# Altium PCB Esquematico.PcbDoc
Units mil, origin at the board's own origin, x right, y up, seen from the top; angles counter-clockwise.
Board outline 2755.91 x 1968.5 mil, 2 copper layers (Top Layer, Bottom Layer); 18 components, 8 nets, 47 pads, 10 vias.
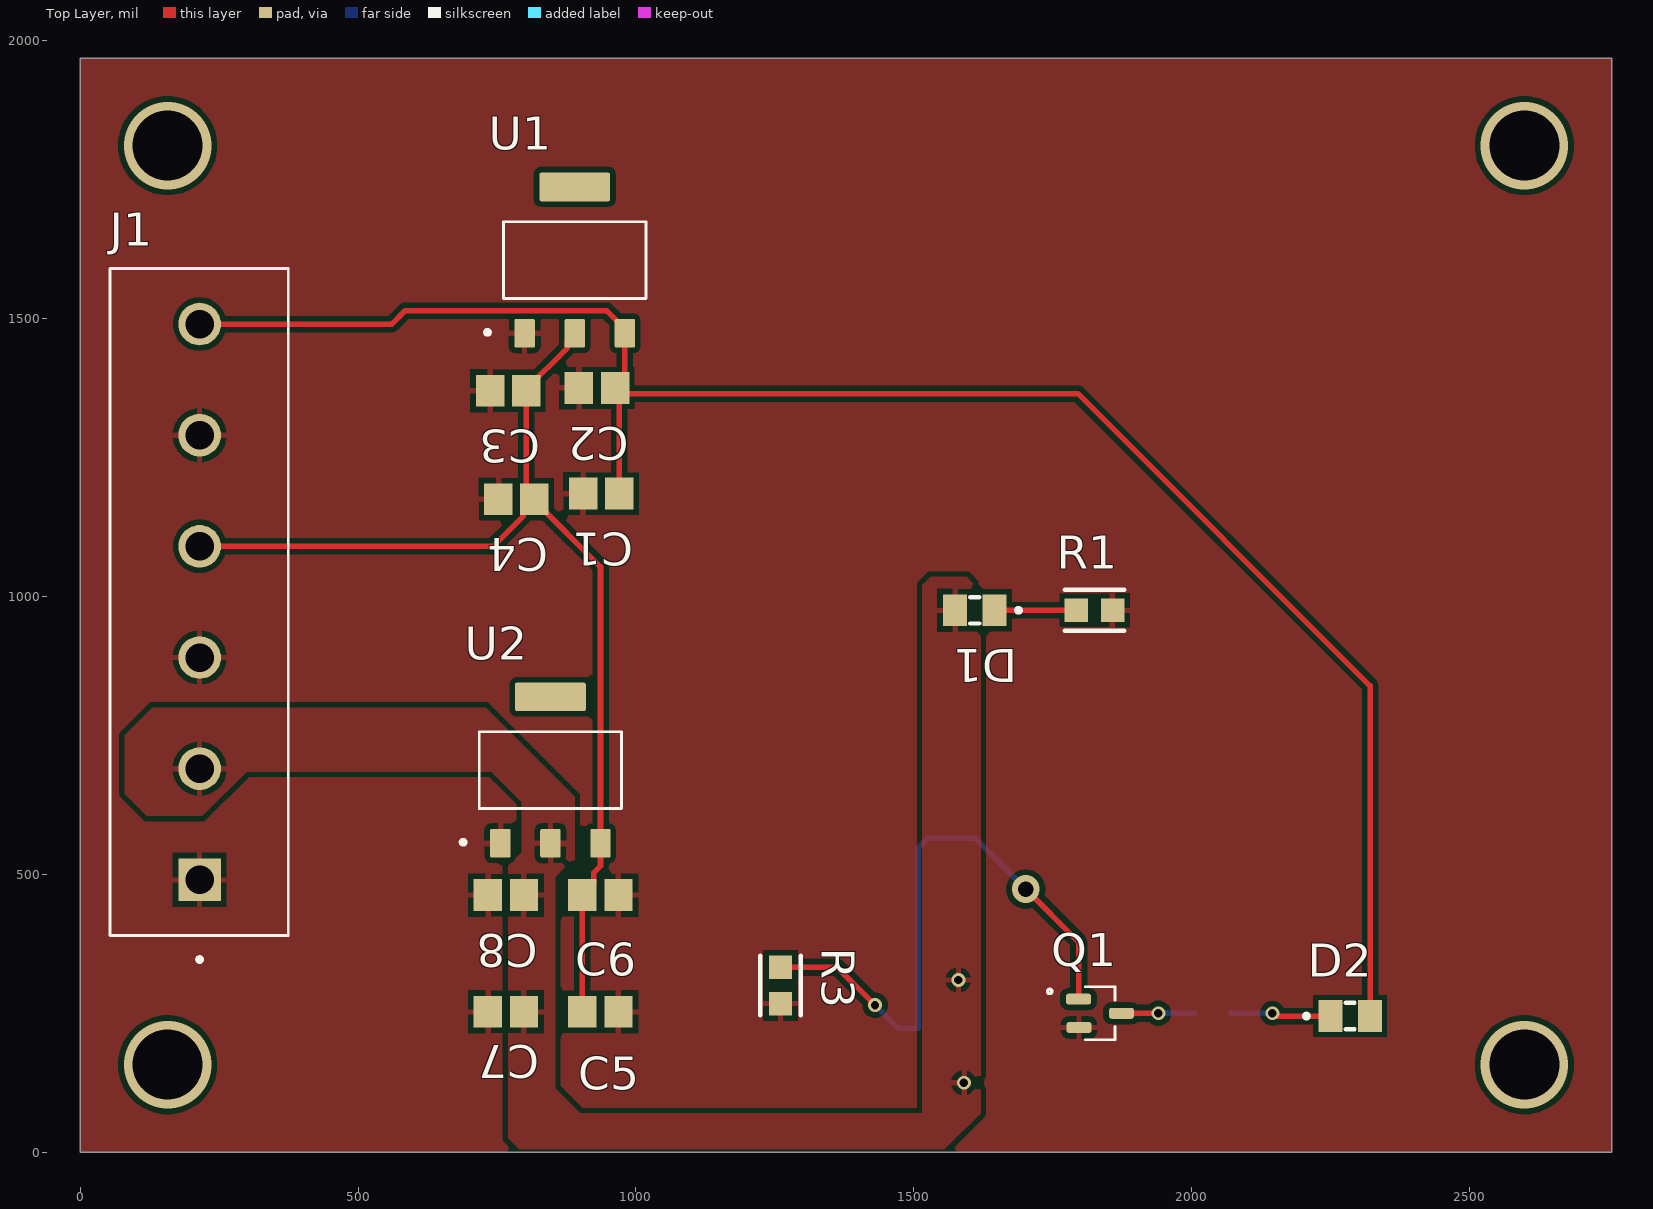
[diagram p0: Top Layer view]
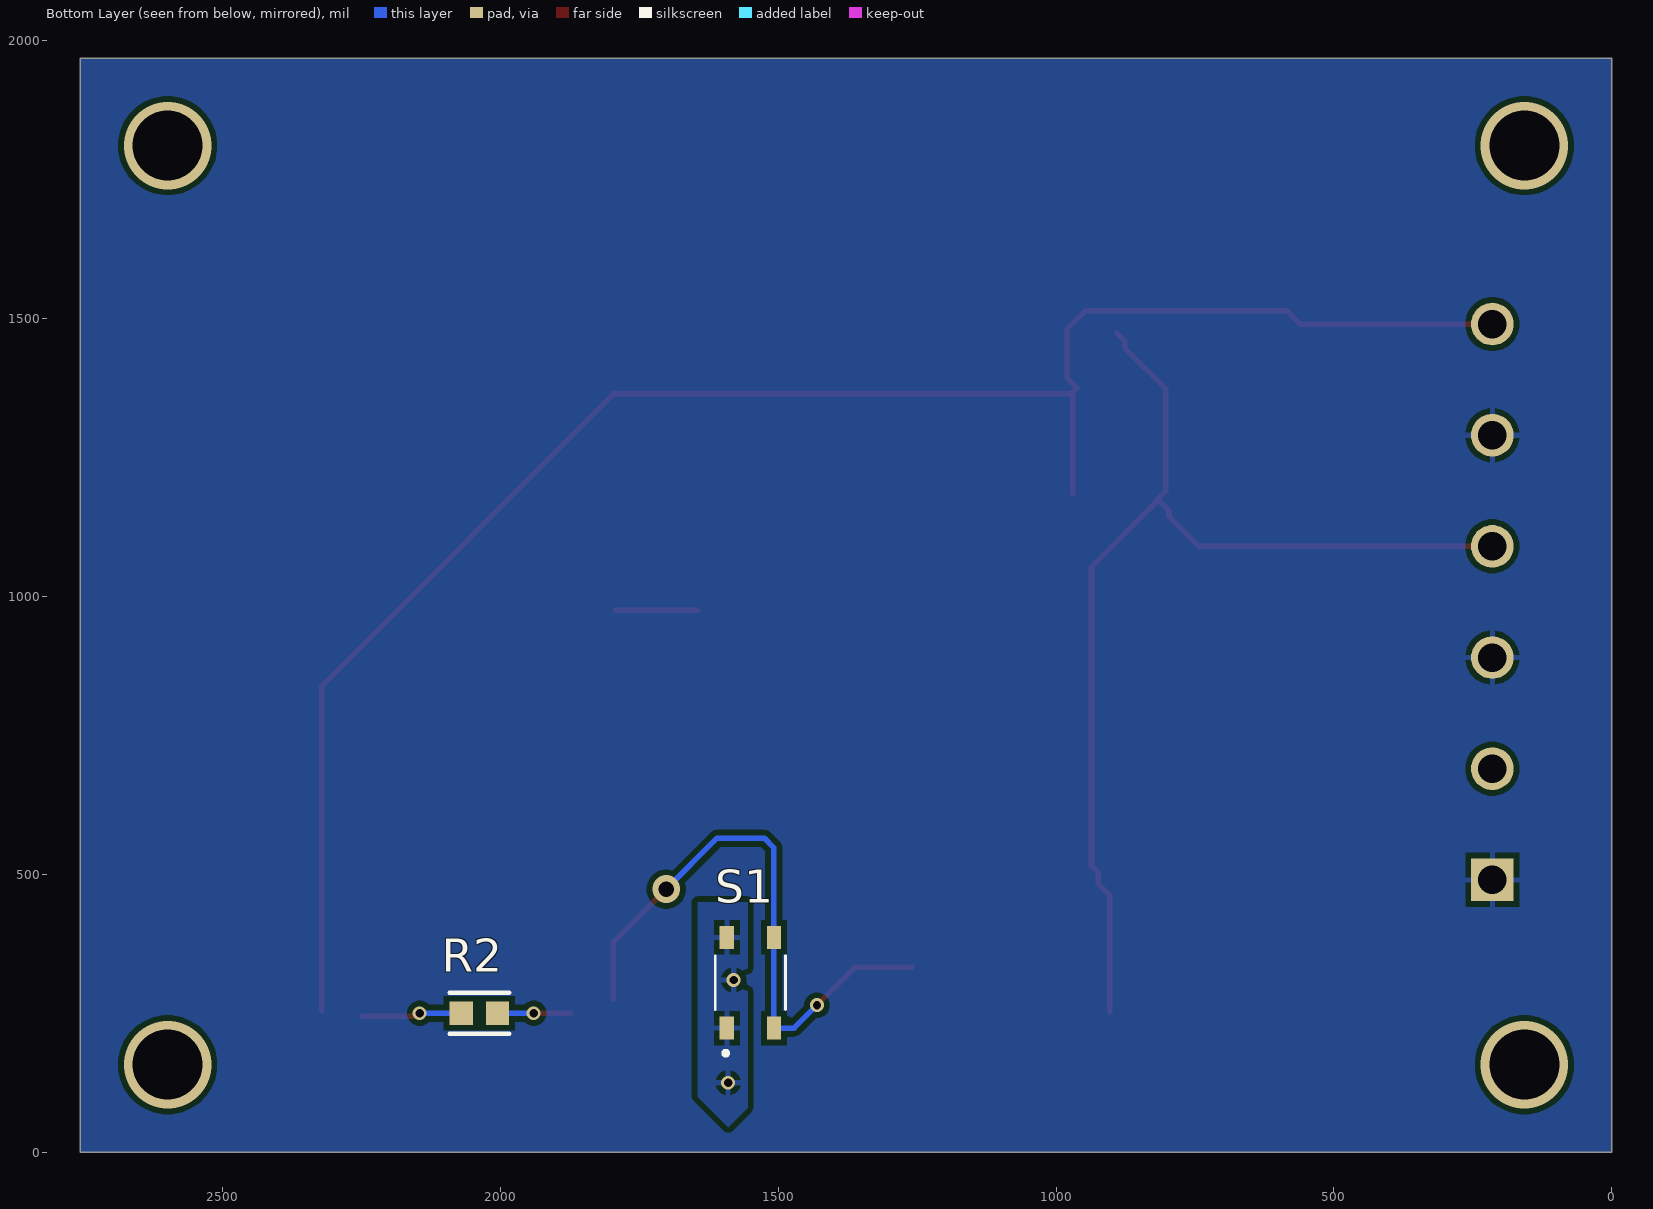
[diagram p1: Bottom Layer view, seen from below]

## Layer stack, top to bottom
Top Solder: solder mask 0.4, Solder Resist, Dk 3.5
Top Layer: signal copper 1.4
Dielectric 1: dielectric 12.6, FR-4, Dk 4.8
Bottom Layer: signal copper 1.4
Bottom Solder: solder mask 0.4, Solder Resist, Dk 3.5

## Board outline
0,0 2755.91,0 2755.91,1968.5 0,1968.5

## Design rules (kind name [scope] priority, off if disabled: settings)
Clearance [All] p1: gap=10 ignorepadtopadclearanceinfootprint=FALSE
PolygonConnect [All] p1: connectstyle=Relief reliefconductorwidth=10 reliefentries=4 polygonreliefangle="90 Angle" airgapwidth=10
RoutingVias [All] p1: holewidth=28 width=50 viastyle="Through Hole" minholewidth=28 minwidth=50 maxholewidth=28 maxwidth=50
SolderMaskExpansion [All] p1: expansion=0 istentingtop=FALSE
SupplyNets "Schematic Supply Nets" [InNet('GND')] p1: voltage=0.000
Width [All] p1: maxlimit=10 minlimit=10 preferedwidth=10
30 further rules are at their usual default settings.

## Components (designator, comment, footprint, x,y, rotation, side; value= is the part's Value field where it differs from the comment)
C1 "10uF" CAPC2013X145X48NL20T23 937.52,1185 r180 top
C2 "100nF" CAPC2013X145X48NL20T23 930,1375 r180 top
C3 "10uF" CAPC2013X145X48NL20T23 770,1370 r180 top
C4 "100nF" CAPC2013X145X48NL20T23 785,1175 r180 top
C5 "10uF" CAPC2013X145X48NL20T23 936.16,252.65 r0 top
C6 "100nF" CAPC2013X145X48NL20T23 936.16,462.65 r0 top
C7 "10uF" CAPC2013X145X48NL20T23 766.16,252.65 r180 top
C8 "100nF" CAPC2013X145X48NL20T23 766.16,462.65 r180 top
D1 "LED_Azul" LEDC2012X120N 1609.57,975 r180 top
D2 "LED_Azul" LEDC2012X120N 2285,245 r0 top
J1 "1729160" PHOENIX_1729160 374.45,390 r90 top
Q1 "NTS4001NT1G" SOT65P220X100-3N 1835,250 r0 top
R1 "330R" FP-MCT0603-IPC_A 1825,975 r0 top
R2 "10k" FP-MCT0603-IPC_A 2037.65,250 r180 bottom
R3 "1k" FP-MCT0603-IPC_A 1260,300 r270 top
S1 "SKRPABE010" SW_SKRPABE010 1550,305 r90 bottom
U1 "AMS1117-5.0" SOT229P700X180-4N 890,1605 r0 top
U2 "AMS1117-3.3v" SOT229P700X180-4N 846.16,687.65 r0 top

## Footprints (in the part's own frame and the unit in brackets; to place one, negate y for a bottom-side part, rotate by r counter-clockwise, add the part's x,y. Pads: shape width x height; smd on the part's side, far side on the other; paste and mask are expansions set on the pad)
CAPC2013X145X48NL20T23 [mm] "Chip Capacitor, 2-Leads, Body 2.00x1.25mm, IPC Medium Density"
  rect 1.3x1.45 smd: 1(-0.825,0) 2(0.825,0)
  body extent -1.1,-0.72 1.1,0.72, height 1.45
FP-MCT0603-IPC_A [mil]
  rect 41.88x41.82 smd paste+0 mask+0: 1(-32.65,0) 2(32.65,0)
  silkscreen extent -54,-37 54,37, body extent -73,-41 73,41, height 10
LEDC2012X120N [mm]
  rect 1.1x1.45 smd: A(0.9,0) C(-0.9,0)
  silkscreen extent -2.1,-0.6 0.2,0.6, body extent -1,-0.65 1,0.65, height 0.9
PHOENIX_1729160 [mm]
  rect 1.95x1.95 / inner round 1.95 / far side rect 1.95x1.95 hole 1.3: 1(2.54,4.05)
  round 1.95 hole 1.3: 2(7.62,4.05) 3(12.7,4.05) 4(17.78,4.05) 5(22.86,4.05) 6(27.94,4.05)
  silkscreen extent -1.2,0 30.48,8.15
SOT65P220X100-3N [mm]
  rrect50% 1.15x0.5 smd: 1(-0.98,0.65) 2(-0.96,-0.65) 3(0.98,0)
  silkscreen extent -2.4,-1.21 0.68,1.21
SOT229P700X180-4N [mm]
  rrect15% 0.93x1.31 smd: 1(-2.29,-3.345) 2(0,-3.345) 3(2.29,-3.345)
  rrect15% 3.24x1.31 smd: 4(0,3.345)
  silkscreen extent -4.09,-3.4 3.25,1.75, body extent -3.25,-3.5 3.25,3.5, height 1.8
SW_SKRPABE010 [mm]
  rect 1.05x0.65 smd: 1(-2.075,1.075) 2(2.075,1.075) 3(-2.075,-1.075) 4(2.075,-1.075)
  silkscreen extent -3.32,-1.6 1.23,1.6, body extent -2.3,-1.6 2.3,1.6, height 2.5

## Part data
C1 C2 C3 C4 C5 C6 C7 C8: library part CMP-2007-01790-1, Manufacturer=Vitramon, Part Number=VJ0805Y222JXAAC
D1 D2: library part SML-LXT0805IW-TR, "LED;Red;11mcd;0.061In.Dia.;SMD;100mA;2V Vf;635nm;140deg;SMD;White Diffused;5V Vr", Package="0805 Lumex", Check_prices=https://www.snapeda.com/parts/SML-LXT0805IW-TR/Lumex+Opto%252FComponents+Inc./view-part/?ref=eda, MF="Lumex Opto/Components", MP=SML-LXT0805IW-TR, SnapEDA_Link=https://www.snapeda.com/parts/SML-LXT0805IW-TR/Lumex+Opto%252FComponents+Inc./view-part/?ref=snap
J1: "PCB Terminal Screw 5.08mm 16AWG 400V 13.5A 6 Position COMBICON MKDSN Series", Package=None, Check_prices=https://www.snapeda.com/parts/1729160/Phoenix+Contact/view-part/?ref=eda, MF="Phoenix Contact", MP=1729160, SnapEDA_Link=https://www.snapeda.com/parts/1729160/Phoenix+Contact/view-part/?ref=snap
Q1: "N-Channel 30V 270mA _Ta_ 330mW _Ta_ Surface Mount SC-70-3 _SOT323_", Package="SC-70 ON Semiconductor", Availability=Unavailable, MF="ON Semiconductor", MP=NTS4001NT1G, Price=None, SnapEDA_Link=https://www.snapeda.com/parts/NTS4001NT1G/ON%20Semiconductor/view-part/274588/?ref=snap
R1 R2 R3: library part CMP-02407-003755-1, "RES SMD 100 OHM 1% 1/8W 0603", Case/Package=0603, Max Operating Temperature=125°C, Max Power Dissipation=100mW, Min Operating Temperature=-55°C, Package Quantity=5000, Resistance=80.6kR, Temperature Coefficient=25ppm/°C, Tolerance=0.1%, Composition="Thin Film", Contact Plating=Tin, Depth=0.85mm, Height=0.022inch, Lead Free="Lead Free", Length=1.55mm, Military Standard=Not, Mount="Surface Mount", Number of Terminations=2, Packaging="Tape and Reel", Power Rating=100mW, Radiation Hardening=No, Width=0.033inch
S1: "Switch Tactile N.O. SPST Button J-Bend 0.05A 16VDC 1.57N SMD Automotive T/R", Package=None, Check_prices=https://www.snapeda.com/parts/SKRPABE010/ALPS/view-part/?ref=eda, MF=ALPS, MP=SKRPABE010, SnapEDA_Link=https://www.snapeda.com/parts/SKRPABE010/ALPS/view-part/?ref=snap
U1: "1A LOW DROPOUT VOLTAGE REGULATOR", Package="SOT-223 Seeed Technology", Availability="Not in stock", Check_prices=https://www.snapeda.com/parts/AMS1117-5.0/ams/view-part/?ref=eda, MF=ams, MP=AMS1117-5.0, Price=None, SnapEDA_Link=https://www.snapeda.com/parts/AMS1117-5.0/ams/view-part/?ref=snap
U2: library part AMS1117-5.0, "1A LOW DROPOUT VOLTAGE REGULATOR", Package="SOT-223 Seeed Technology", Availability="Not in stock", Check_prices=https://www.snapeda.com/parts/AMS1117-5.0/ams/view-part/?ref=eda, MF=ams, MP=AMS1117-5.0, Price=None, SnapEDA_Link=https://www.snapeda.com/parts/AMS1117-5.0/ams/view-part/?ref=snap

## Via types
v1: diameter 25, hole 15, Top Layer to Bottom Layer, 5 vias
v2: diameter 157.48, hole 125.98, Top Layer to Bottom Layer, 4 vias
v3: diameter 50, hole 28, Top Layer to Bottom Layer, 1 vias

## Nets (pads, with @x,y where several pads share a name; then routed paths per layer and width w, separated by ;. In a path a pad name is that pad's centre, name@x,y a point inside that pad or via, vN(x,y) a via of type N, cw(c..) or ccw(c..) an arc to the next point about the centre after c; other vN are vias at no path point)
3v3: C7.1 C8.1 D1.A J1.2 S1.1 S1.2 U2.2
  other v1: 1590,125 1580,310
5v: C3.1 C4.1 C5.1 C6.1 J1.4 U1.2 U2.3 | length 1969.6
  Top Layer w10: J1.4 742.87,1090 796.89,1144.02 796.89,1154.41 C4.1 ; U1.2 876.69,1460 876.69,1447.17 802.48,1372.95 C3.1 802.48,1190 C4.1 ; C5.1 C6.1 924.27,483.24 924.27,503.12 936.32,515.16 U2.3 936.32,1053.21 817.48,1172.05 C4.1
GND: C1.2 C2.2 C3.2 C4.2 C5.2 C6.2 C7.2 C8.2 J1.1 J1.3 J1.5 Q1.2 R1.2 R3.2 U1.1 U2.1
NetD1_C: D1.C R1.1 | length 147.3
  Top Layer w10: D1.C R1.1
NetD2_C: D2.C R2.1 | length 176.4
  Top Layer w10: v1(2145,250) 2149.06,250 2154.12,244.94 2249.51,244.94 D2.C
  Bottom Layer w10: R2.1 v1@2140,250
NetQ1_1: Q1.1 R3.1 S1.3 S1.4 | length 1093.4
  Top Layer w10: R3.1 1362.2,332.65 v1(1430.16,264.7) ; v3(1701.4,473.45) 1796.42,378.44 Q1.1
  Bottom Layer w10: v1(1430.16,264.7) 1471.55,223.31 S1.3 S1.4 1507.68,547.68 1525,565 1609.86,565 v3(1701.4,473.45)
NetQ1_3: Q1.3 R2.2 | length 131.4
  Top Layer w10: Q1.3 v1(1940,250)
  Bottom Layer w10: v1(1940,250) R2.2
Vin: C1.1 C2.1 D2.A J1.6 U1.3 | length 3259.6
  Top Layer w10: J1.6 560.94,1490 585.04,1514.09 946.85,1514.09 980.16,1480.79 U1.3 980.16,1392.68 C2.1 ; C1.1 970,1367.48 C2.1 ; D2.A@2320.87,255 2320.87,839.13 1795,1365 972.48,1365 C2.1
pads on no net: U1.4 U2.4
copper on no net:
  other v2: 157.48,157.48 2598.43,157.48 157.48,1811.02 2598.43,1811.02

## Polygon pours and split planes (outlines as drawn)
GND on Bottom Layer "GND_L02_P003" (solid, pour order 3): 0,0 2755.91,0 2755.91,1968.5 0,1968.5
3v3 on Bottom Layer "3V3_L02_P001" (solid, pour order 1): 1555,290 1555,450 1645,450 1645,100 1590,45 1555,80
GND on Top Layer "GND_L01_P004" (solid, pour order 4): 0,0 2755.91,0 2755.91,1968.5 0,1968.5
3v3 on Top Layer "3V3_L01_P000" (solid, pour order 0): 1595,1035 1620,1010 1620,70 1555,5 790,5 770,25 770,515 795,540 795,630 740,685 300,685 220,605 120,605 80,645 80,750 130,800 730,800 890,640 890,525 885,525 855,495 855,115 900,70 1515,70 1515,1020 1530,1035

## Other copper
Multi-Layer:
  lines w10: 4800,0 4820,20

## Silkscreen, mask and mechanical layers (free items; w line width, h text height)
Mechanical 13:
  the board outline again, w0